# EAGLE board PCB-SE-C15 (EAGLE 6.4)
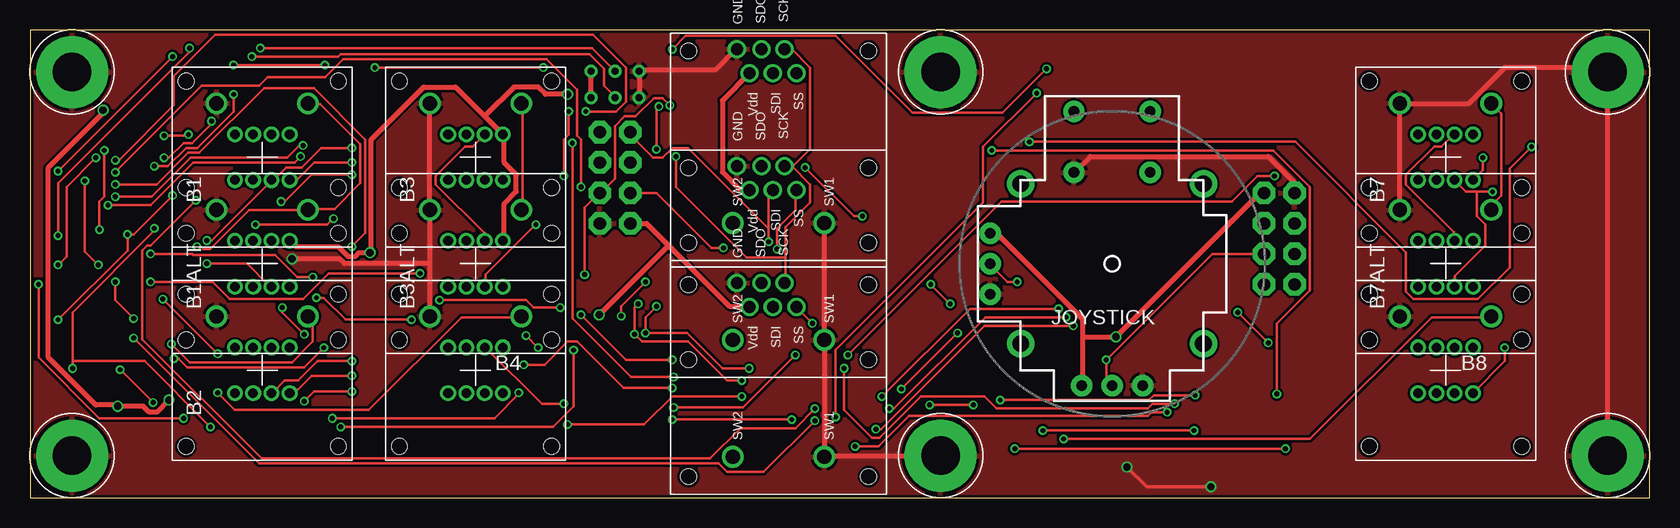
[diagram p0: board, top side]
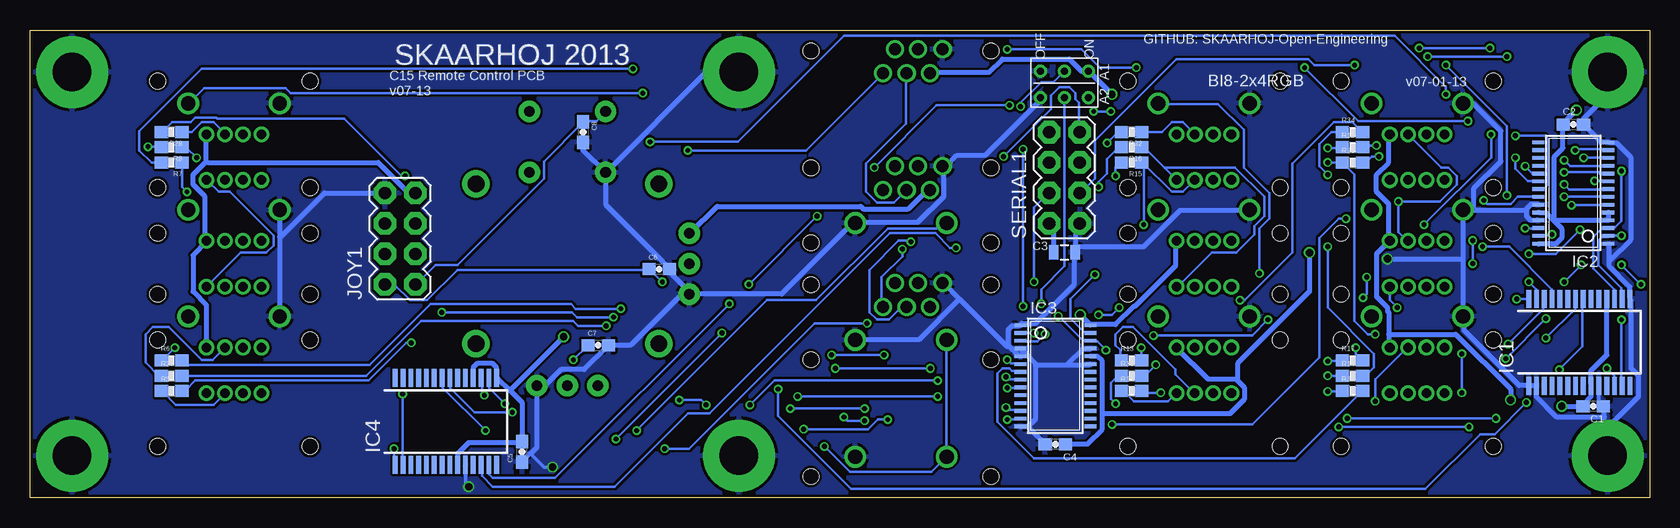
[diagram p1: board, bottom side, seen from below]

Size 135 x 39 mm. Coordinates in mm from the lower left corner, seen from the top.
Outline: 0,0 135,0 135,39 0,39 0,0
Copper layers (1*16): Top 0.035mm / dielectric 1.5mm / Bottom 0.035mm
Design rules "Fusion_eagle_rule_v1.1": minimum track width 6mil, minimum drill 12mil, track to track 6mil, track to pad 6mil, pad to pad 6mil, via to via 6mil, smd to smd 0mil, copper to edge 10mil, drill to drill 10mil, minimum pad ring 10mil, minimum via ring 6mil, stop-mask expansion 2mil, vias tented up to drill 100mil, thermal gap 10mil
Net classes: 0 default: width 0.203 mm, drill 0.406 mm, clearance 0.203 mm; 1 Power: width 0.406 mm, drill 0.61 mm, clearance 0.203 mm

## Footprints (pad centres in the part's own frame; a part is rotated, then mirrored left to right if it is on the bottom)
NKK-KP01 = drill 0.8: B(-) 1.905,-0.762; COM(+) 1.905,-2.286; G(-) -1.905,-2.286; P$3 1.905,0.762; P$4 1.905,2.286; P$7 -1.905,0.762; P$8 -1.905,2.286; R(-) -1.905,-0.762 | drill 1.2: P$1 4.496,3.81; P$1A 4.496,-3.81 | hole 1.3: -6.35,6.35; 6.35,6.35; 6.35,-6.35; -6.35,-6.35
0603-CAP = smd 1.1 x 1: 1 -0.85,0; 2 0.85,0
0805 = smd 0.8 x 1.2: 1 -0.9,0; 2 0.9,0
SSOP28 = smd 0.4 x 1.5: 1 -4.225,-3.625; 2 -3.575,-3.625; 3 -2.925,-3.625; 4 -2.275,-3.625; 5 -1.625,-3.625; 6 -0.975,-3.625; 7 -0.325,-3.625; 8 0.325,-3.625; 9 0.975,-3.625; 10 1.625,-3.625; 11 2.275,-3.625; 12 2.925,-3.625; 13 3.575,-3.625; 14 4.225,-3.625; 15 4.225,3.625; 16 3.575,3.625; 17 2.925,3.625; 18 2.275,3.625; 19 1.625,3.625; 20 0.975,3.625; 21 0.325,3.625; 22 -0.325,3.625; 23 -0.975,3.625; 24 -1.625,3.625; 25 -2.275,3.625; 26 -2.925,3.625; 27 -3.575,3.625; 28 -4.225,3.625
TSSOP28 = smd 0.305 x 0.991: 1 -4.225,-2.918; 2 -3.575,-2.918; 3 -2.925,-2.918; 4 -2.275,-2.918; 5 -1.625,-2.918; 6 -0.975,-2.918; 7 -0.325,-2.918; 8 0.325,-2.918; 9 0.975,-2.918; 10 1.625,-2.918; 11 2.275,-2.918; 12 2.925,-2.918; 13 3.575,-2.918; 14 4.225,-2.918; 15 4.225,2.918; 16 3.575,2.918; 17 2.925,2.918; 18 2.275,2.918; 19 1.625,2.918; 20 0.975,2.918; 21 0.325,2.918; 22 -0.325,2.918; 23 -0.975,2.918; 24 -1.625,2.918; 25 -2.275,2.918; 26 -2.925,2.918; 27 -3.575,2.918; 28 -4.225,2.918
2X4 = drill 1.016 pad 1.88 octagon: 1 -3.81,-1.27; 2 -3.81,1.27; 3 -1.27,-1.27; 4 -1.27,1.27; 5 1.27,-1.27; 6 1.27,1.27; 7 3.81,-1.27; 8 3.81,1.27
PLAYSTATION2_ANALOG_JOYSTICK = drill 0.9 pad 1.778: B1A -3.175,12.7; B1B 3.175,12.7; B2A -3.175,7.62; B2B 3.175,7.62 | drill 0.889 pad 1.778: H1 -2.54,-10.16; H2 0,-10.16; H3 2.54,-10.16; V1 -10.16,2.54; V2 -10.16,0; V3 -10.16,-2.54 | drill 1.397 pad 2.286: MOUNT1 -7.62,6.668; MOUNT2 -7.62,-6.668; MOUNT3 7.62,-6.668; MOUNT4 7.62,6.668
0603-RES = smd 1.1 x 1: 1 -0.85,0; 2 0.85,0
SMART_SWITCH = drill 1.2: 1 6.35,3.81; 2 6.35,-3.81 | drill 1: 3 -8.153,-3.48; 4 -6.147,-2.413; 5 -8.153,-1.422; 6 -6.147,-0.483; 7 -8.153,0.508; 8 -6.147,1.499 | hole 1.3: -8.001,7.506; 8.001,7.506; 8.001,-7.506; -8.001,-7.506
3.2MMPAD6MM = drill 3.2 pad 6: P$1 0,0
2BITADDR = drill 0.6: A1 0,0; A2 2.2,0; H2 0,2; H3 2.2,2; L2 0,-2; L3 2.2,-2

## Placement (x,y rotation side)
B1  KP01-RGB  [NKK-KP01]  19.36,28.39 90 top
B1ALT  KP01-RGB  [NKK-KP01]  19.36,19.5 90 top
B2  KP01-RGB  [NKK-KP01]  19.36,10.61 90 top
B3  KP01-RGB  [NKK-KP01]  37.14,28.39 90 top
B3ALT  KP01-RGB  [NKK-KP01]  37.14,19.5 90 top
B4  KP01-RGB  [NKK-KP01]  37.14,10.61 90 top
B7  KP01-RGB  [NKK-KP01]  118,28.39 90 top
B7ALT  KP01-RGB  [NKK-KP01]  118,19.5 90 top
B8  KP01-RGB  [NKK-KP01]  118,10.61 90 top
C1  100nF  [0603-CAP]  4.7,7.62 180 bottom
C2  100nF  [0603-CAP]  6.35,31.11 0 bottom
C3  10uF  [0805]  48.77,20.45 0 bottom
C4  100nF  [0603-CAP]  49.53,4.45 180 bottom
C5  100nF  [0603-CAP]  93.98,3.81 90 bottom
C6  10nF  [0603-CAP]  82.55,19.05 0 bottom
C7  10nF  [0603-CAP]  87.63,12.7 0 bottom
C8  10nF  [0603-CAP]  88.9,30.48 270 bottom
IC1  MCP23017SS  [SSOP28]  5.84,12.95 0 bottom
IC2  PCA9685  [TSSOP28]  6.35,25.4 90 bottom
IC3  PCA9685  [TSSOP28]  49.53,10.16 270 bottom
IC4  MCP23017SS  [SSOP28]  100.33,6.35 0 bottom
JOY1  M04X2  [2X4]  104.14,21.59 90 bottom
JOYSTICK  PLAYSTATION2_ANALOG_JOYSTICK  [PLAYSTATION2_ANALOG_JOYSTICK]  90.2,19.5 0 top
R5  270  [0603-RES]  123.19,8.89 0 bottom
R6  270  [0603-RES]  123.19,11.43 0 bottom
R7  270  [0603-RES]  123.19,27.94 180 bottom
R8  270  [0603-RES]  123.19,29.21 180 bottom
R13  270  [0603-RES]  43.18,11.43 0 bottom
R14  270  [0603-RES]  43.18,8.89 0 bottom
R15  270  [0603-RES]  43.18,27.94 180 bottom
R16  270  [0603-RES]  43.18,29.21 180 bottom
R17  270  [0603-RES]  24.77,11.43 0 bottom
R18  270  [0603-RES]  24.77,10.16 0 bottom
R19  270  [0603-RES]  24.77,29.21 0 bottom
R20  270  [0603-RES]  24.77,27.94 0 bottom
R27  270  [0603-RES]  123.19,10.16 0 bottom
R28  270  [0603-RES]  123.19,30.48 180 bottom
R31  270  [0603-RES]  43.18,10.16 0 bottom
R32  270  [0603-RES]  43.18,30.48 180 bottom
R33  270  [0603-RES]  24.77,8.89 0 bottom
R34  270  [0603-RES]  24.77,30.48 0 bottom
SERIAL1  M04X2  [2X4]  48.77,26.67 90 bottom
SSW1  SMART_SWITCHSMART_SWITCH_8PIN  [SMART_SWITCH]  62.4,9.75 270 top
SSW1ALT  SMART_SWITCHSMART_SWITCH_8PIN  [SMART_SWITCH]  62.4,19.5 270 top
SSW2  SMART_SWITCHSMART_SWITCH_8PIN  [SMART_SWITCH]  62.4,29.25 270 top
U$5  GNDPAD6MM  [3.2MMPAD6MM]  3.5,3.5 0 top
U$6  GNDPAD6MM  [3.2MMPAD6MM]  131.5,35.5 0 top
U$8  GNDPAD6MM  [3.2MMPAD6MM]  131.5,3.5 0 top
U$15  GNDPAD6MM  [3.2MMPAD6MM]  3.5,35.5 0 top
U$18  GNDPAD6MM  [3.2MMPAD6MM]  75.9,3.5 0 top
U$19  2BITADDR  [2BITADDR]  48.77,35.56 270 bottom
U$21  GNDPAD6MM  [3.2MMPAD6MM]  75.9,35.5 0 top

## Library data of the parts
B1 B1ALT B2 B3 B3ALT B4 B7 B7ALT B8 JOYSTICK SSW1 SSW1ALT SSW2 U$5 U$6 U$8 U$15 U$18 U$19 U$21 = SKAARHOJ
C1-C8 JOY1 R5-R8 R13-R20 R27 R28 R31-R34 SERIAL1 = SparkFun
IC1 IC4 = microchip; MF: MICROCHIP; MPN: MCP23017-E/SS; OC_FARNELL: 1467674; OC_NEWARK: 31K2960
IC2 IC3 = wsmith

## Nets
5V [Power]: B1.COM(+) B1ALT.COM(+) B2.COM(+) B3.COM(+) B3ALT.COM(+) B4.COM(+) B7.COM(+) B7ALT.COM(+) B8.COM(+) C1.2 C2.1 C3.1 C4.1 C5.2 IC1.9 IC1.18 IC2.4 IC2.5 IC2.24 IC2.28 IC3.24 IC3.28 IC4.9 IC4.15 IC4.18 JOY1.7 JOYSTICK.H1 JOYSTICK.V1 SERIAL1.2 SSW1.4 SSW1ALT.4 SSW2.4 U$19.H2 U$19.H3
A1: IC1.16 IC2.2 IC3.2 IC4.16 U$19.A1
A2: IC1.17 IC2.3 IC3.3 IC4.17 U$19.A2
GND [Power]: B1.P$1 B1ALT.P$1 B2.P$1 B3.P$1 B3ALT.P$1 B4.P$1 B7.P$1 B7ALT.P$1 B8.P$1 C1.1 C2.2 C3.2 C4.2 C5.1 C6.2 C7.2 C8.2 IC1.1 IC1.2 IC1.10 IC1.15 IC2.1 IC2.14 IC2.23 IC2.25 IC3.1 IC3.4 IC3.5 IC3.14 IC3.23 IC3.25 IC4.10 JOY1.8 JOYSTICK.B2A JOYSTICK.H3 JOYSTICK.V3 SERIAL1.1 SSW1.1 SSW1.3 SSW1ALT.1 SSW1ALT.3 SSW2.1 SSW2.3 U$5.P$1 U$6.P$1 U$8.P$1 U$15.P$1 U$18.P$1 U$19.L2 U$19.L3 U$21.P$1
GPA0: B8.P$1A IC1.21
GPA1: B7.P$1A B7ALT.P$1A IC1.22
GPA2: IC1.23
GPA3: IC1.24
GPA4: B1.P$1A B1ALT.P$1A IC1.25
GPA5: B2.P$1A IC1.26
GPA6: B3.P$1A B3ALT.P$1A IC1.27
GPA7: B4.P$1A IC1.28
GPA8: IC1.8
GPA9: IC1.7
GPA10: IC1.6
I2C_SCL: IC1.12 IC2.26 IC3.26 IC4.12 SERIAL1.4
I2C_SDA: IC1.13 IC2.27 IC3.27 IC4.13 SERIAL1.3
L0: B1.G(-) B1ALT.G(-) R20.1
L0B: B1.B(-) B1ALT.B(-) R34.1
L1: B1.R(-) B1ALT.R(-) R19.1
L1B: B2.B(-) R33.1
L2: B2.G(-) R18.1
L2B: B3.B(-) B3ALT.B(-) R32.1
L3: B2.R(-) R17.1
L3B: B4.B(-) R31.1
L4: B3.G(-) B3ALT.G(-) R16.1
L5: B3.R(-) B3ALT.R(-) R15.1
L6: B4.G(-) R14.1
L6B: B7.B(-) B7ALT.B(-) R28.1
L7: B4.R(-) R13.1
L7B: B8.B(-) R27.1
L12: B7.G(-) B7ALT.G(-) R8.1
L13: B7.R(-) B7ALT.R(-) R7.1
L14: B8.G(-) R6.1
L15: B8.R(-) R5.1
N$2: IC3.13 R27.2
N$3: IC3.12 R28.2
N$4: IC2.13 R13.2
N$5: IC2.12 R14.2
N$6: IC3.11
N$7: IC2.11 R15.2
N$9: IC2.10 R16.2
N$10: IC2.9 R17.2
N$11: IC2.8 R18.2
N$12: IC2.7 R19.2
N$13: IC3.10
N$14: IC3.9 R31.2
N$15: IC3.8 R32.2
N$16: IC3.7 R33.2
N$17: IC3.6 R34.2
N$19: IC2.6 R20.2
N$20: IC2.15
N$21: IC2.16
N$22: IC2.17
N$23: IC2.18
N$24: IC2.19 R8.2
N$25: IC2.20 R7.2
N$26: IC2.21 R6.2
N$27: IC2.22 R5.2
POT1: C6.1 JOY1.2 JOYSTICK.V2
POT2: C7.1 JOY1.3 JOYSTICK.H2
SDI_MOSI: SERIAL1.8 SSW1.6 SSW1ALT.6 SSW2.6
SDI_SCLK: SERIAL1.7 SSW1.7 SSW1ALT.7 SSW2.7
SSGPA0: IC4.21 SSW1.2 SSW1ALT.2
SSGPA1: IC4.22 SSW2.2
SSGPB0: IC4.1 SSW1.8 SSW1ALT.8
SSGPB1: IC4.2 SSW2.8
SW: C8.1 JOY1.1 JOYSTICK.B1A

## Tracks (layer width: path | path; a pad name or v marks a point on that pad's centre or on a via)
5V  (via drill 0.61)
  Top 0.406: 53.24,21.03 51.41,22.86 SERIAL1.2 | 53.24,21.03 58.32,15.95 59.94,15.95 SSW1.4 | B3ALT.COM(+) 39.52,21.44 39.52,24.49 40.54,25.5 40.54,26.92 39.52,27.94 39.52,30.28 B3.COM(+) 39.32,30.38 37.9,31.8 | v47.45,15.24 53.24,21.03 | v11.58,8.13 10.57,7.11 9.96,7.11 9.45,7.62 v7.32,7.62 7.21,7.72 5.49,7.72 1.52,11.68 1.52,27.53 6.1,32.11 v6.1,32.31 | B1ALT.COM(+) 21.74,21.34 22.15,20.93 25.7,20.93 26.52,20.12 27.13,20.12 27.43,20.42 v28.35,20.42 28.45,20.52 28.45,29.87 32.82,34.24 35.46,34.24 37.9,31.8 | U$19.H3 46.74,33.43 46.74,35.56 U$19.H2 | SSW1ALT.4 59.94,25.7 59.13,25.7 57.71,27.13 57.71,33.12 59.94,35.36 SSW2.4 | 87.78,13.41 87.78,9.45 87.68,9.35 JOYSTICK.H1 | 87.78,13.41 87.78,14.83 80.67,21.95 80.06,21.95 JOYSTICK.V1 | 87.78,13.41 v90.53,13.41 102.51,25.4 JOY1.7 | 37.9,31.8 40.34,34.24 42.37,34.24 42.98,33.63 v44.81,33.63
  Bottom 0.406: C3.1 49.68,20.52 49.68,22.55 49.99,22.86 SERIAL1.2 | B3ALT.COM(+) 39.52,21.34 39.52,19.3 42.88,15.95 42.98,15.95 44.5,14.43 46.53,14.43 IC3.28 46.74,14.53 v47.45,15.24 | 45.62,7.01 45.62,5.69 46.84,4.47 48.67,4.47 C4.1 | 45.62,7.01 45.62,11.38 46.02,11.79 46.53,11.79 IC3.24 | 34.44,9.86 36.78,9.86 39.42,12.5 B4.COM(+) | 34.44,9.86 33.73,9.14 33.73,8.23 34.95,7.01 45.62,7.01 | IC2.5 3.45,23.77 3.45,23.16 IC2.4 3.66,23.16 7.82,23.16 7.92,23.06 | 8.03,23.16 8.64,23.77 9.25,23.77 IC2.24 | 8.03,23.16 7.92,23.06 | 7.92,23.06 7.32,22.45 7.32,21.64 7.82,21.13 9.25,21.13 IC2.28 | 8.03,23.16 7.92,23.27 7.92,28.45 7.21,29.16 7.21,31.09 C2.1 7.11,31.29 v6.1,32.31 | IC1.18 3.56,16.56 3.56,11.89 4.88,10.57 4.88,9.45 IC1.9 4.88,9.25 4.88,8.43 5.49,7.82 5.49,7.62 C1.2 v7.32,7.62 | 21.74,13.61 21.74,15.44 21.84,15.54 21.84,15.85 22.76,16.76 22.76,20.32 21.74,21.34 B1ALT.COM(+) 21.74,21.54 21.74,24.49 22.76,25.5 22.76,26.92 21.74,27.94 21.74,30.28 B1.COM(+) | 21.74,13.61 21.74,12.6 B2.COM(+) | v11.58,8.13 11.58,9.04 16.15,13.61 21.74,13.61 | v28.35,20.42 28.35,17.17 34.34,11.18 34.34,9.96 34.44,9.86 | B8.COM(+) 120.29,12.6 120.29,16.05 121.41,17.17 121.41,20.22 120.29,21.34 B7ALT.COM(+) 120.4,21.54 120.4,25.09 121.41,26.11 121.41,26.92 120.29,28.04 | 120.29,28.04 120.29,30.28 B7.COM(+) | JOY1.7 103.43,25.4 105.97,27.94 120.19,27.94 120.29,28.04 | SSW2.4 59.94,35.46 55.07,35.46 53.95,36.58 48.36,36.58 47.35,35.56 U$19.H2 46.63,35.46 v44.81,33.63 | 95,8.94 96.01,9.96 IC4.15 96.11,10.16 96.11,10.87 96.42,11.18 97.74,11.18 98.04,10.87 98.04,10.06 IC4.18 | 95,8.94 93.98,7.92 C5.2 94.08,4.57 98.45,4.57 99.36,3.66 99.36,2.74 IC4.9
  Bottom 0.406: v90.53,13.41 95,8.94 | SSW1ALT.4 60.05,25.6 60.25,25.6 61.77,24.08 65.53,24.08 65.73,24.28 77.72,24.28 79.96,22.05 JOYSTICK.V1
A1  (via drill 0.41)
  Top 0.203: v52.22,15.95 51.31,15.04 v51.31,13.72 54.76,13.72 57.71,10.77 v59.94,10.77 | v52.22,29.06 52.22,32.41 v52.43,32.61 | v95.4,7.82 93.57,7.82 93.17,7.42 80.57,7.42 79.55,8.43 74.27,8.43 70.81,4.98 70.21,4.98 67.87,7.32 v67.87,10.77 | v2.34,21.84 2.34,26.21 13.31,37.19 v13.31,37.49 | v19.2,37.49 46.84,37.49 U$19.A1
  Bottom 0.203: IC1.16 2.34,16.66 2.34,17.48 4.27,19.41 4.27,21.44 3.96,21.74 3.45,21.74 IC2.2 3.35,21.84 v2.34,21.84 | v51.31,13.72 52.43,13.72 IC3.2 | v52.22,29.06 v52.22,15.95 | v52.43,32.61 52.43,32.92 50.7,34.65 49.68,34.65 U$19.A1 | v95.4,7.82 96.72,9.14 96.72,9.96 IC4.16 | v59.94,10.77 v67.87,10.77 | v19.2,37.49 v13.31,37.49
A2  (via drill 0.41)
  Top 0.203: v50.7,16.15 50.39,15.85 v50.39,13.61 51,13.01 54.86,13.01 58.12,9.75 v59.33,9.75 | v97.13,8.53 93.67,8.53 93.27,8.13 v80.87,8.13 | v74.98,7.72 v78.64,7.72 | v11.89,36.78 v2.34,27.23 | v18.49,36.78 25.7,36.78 25.91,36.98 46.63,36.98 47.85,35.76 47.85,34.34 48.77,33.43 U$19.A2
  Bottom 0.203: IC1.17 2.95,16.66 2.95,17.37 4.67,19.1 4.67,21.74 3.96,22.45 3.45,22.45 IC2.3 3.35,22.55 2.85,22.55 2.34,23.06 v2.34,27.23 | v50.39,13.61 51,13.01 52.43,13.01 IC3.3 | v50.7,16.15 50.7,17.37 48.77,19.3 U$19.A2 | v97.13,8.53 97.33,8.74 97.33,9.96 IC4.17 | v80.87,8.13 79.05,8.13 v78.64,7.72 | v74.98,7.72 72.95,9.75 v59.33,9.75 | v18.49,36.78 v11.89,36.78
GND  (via drill 0.6, 0.61)
  Top 0.305: v98.42,0.89 93.09,0.89 v91.44,2.54
  Top 0.406: B7ALT.P$1 114.2,24.08 114.2,32.82 B7.P$1 114.4,32.82 119.89,32.82 122.94,35.87 131.17,35.87 131.37,35.66 U$6.P$1 131.47,35.46 131.47,3.56 U$8.P$1 | 33.33,19.51 33.33,23.98 B3ALT.P$1 33.33,24.18 33.33,32.82 B3.P$1 | 33.33,19.51 33.33,15.14 B4.P$1 | U$19.L3 50.8,33.43 50.8,35.56 U$19.L2 50.9,35.66 57.1,35.66 58.83,37.39 SSW2.3 | U$18.P$1 75.89,3.45 66.45,3.45 SSW1.1 66.24,3.45 66.24,13.11 SSW1ALT.1 66.24,13.31 66.24,22.86 SSW2.1 | v21.84,19.91 25.81,19.91 26.21,19.51 33.33,19.51 | JOY1.8 105.36,25.4 105.36,26.31 103.23,28.45 88.39,28.45 87.07,27.13 JOYSTICK.B2A
  Bottom 0.305: IC4.10 98.7,1.17 v98.42,0.89 | v91.44,2.54 92.15,2.54 93.27,3.66 | IC1.10 4.22,7.99 C1.1
  Bottom 0.406: 114.2,21.74 114.2,23.98 B7ALT.P$1 | 114.2,21.74 114.2,15.14 B8.P$1 | JOY1.8 110.44,25.4 114.1,21.74 114.2,21.74 | U$15.P$1 3.56,35.46 3.56,33.53 5.49,31.6 5.49,31.29 C2.2 5.49,31.09 4.06,29.67 3.45,29.67 IC2.14 3.25,29.57 2.74,29.57 1.52,28.35 1.52,21.54 3.25,19.81 3.35,19.81 | 10.26,23.98 10.26,24.08 9.86,24.49 9.35,24.49 IC2.23 | 10.26,23.98 10.26,23.47 9.96,23.16 9.35,23.16 IC2.25 | 14.63,23.98 15.54,23.98 B1ALT.P$1 15.54,23.77 15.54,19.91 | 14.63,23.98 10.26,23.98 | 15.54,19.91 15.54,15.14 B2.P$1 15.44,14.94 15.44,13.92 10.87,9.35 10.26,9.35 IC1.1 10.06,9.35 9.45,9.35 IC1.2 9.45,9.14 9.45,8.43 7.72,6.71 3.76,6.71 | 14.63,23.98 14.63,25.81 12.39,28.04 12.39,30.58 14.63,32.82 15.54,32.82 B1.P$1 | 3.35,19.81 3.35,19.3 1.63,17.58 1.63,16.66 IC1.15 1.52,16.46 1.52,10.77 0.91,10.16 0.91,8.43 3.66,5.69 U$5.P$1 3.76,3.76 3.76,6.71 | 3.35,19.81 3.35,21.13 IC2.1 | 3.76,6.71 3.76,7.62 C1.1 | C5.1 93.98,3.05 93.37,3.66 93.27,3.66 92.76,4.17 92.76,9.25 JOYSTICK.H3 92.56,9.35 92.05,9.35 90.73,10.67 88.8,10.67 86.87,12.6 C7.2 84.94,12.7 80.77,16.87 80.06,16.87 JOYSTICK.V3 | C8.2 88.9,28.96 87.07,27.13 JOYSTICK.B2A | JOYSTICK.V3 80.06,17.17 81.69,18.8 81.69,19 C6.2 81.79,19.2 86.97,24.38 86.97,26.92 JOYSTICK.B2A | U$21.P$1 76,35.46 78.64,35.46 86.87,27.23 JOYSTICK.B2A | C3.2 47.85,20.52 47.85,22.55 47.55,22.86 SERIAL1.1 | 51.82,5.89 52.43,5.89 IC3.14 | 51.82,5.89 50.39,4.47 C4.2 | 51.1,11.07 48.46,11.07 | 48.46,11.07 46.63,11.07 IC3.23 | 52.12,12.09 52.43,12.39 IC3.4 | 52.12,12.09 51.1,11.07 | 52.12,12.09 52.43,11.79 IC3.5 52.63,11.89 53.44,12.7 | IC3.25 46.63,12.39 47.24,12.39 48.46,11.18 48.46,11.07
  Bottom 0.406: 53.44,12.7 53.44,14.02 53.14,14.33 52.53,14.33 IC3.1 52.32,14.53 51.21,14.53 47.95,17.78 47.95,20.32 C3.2 | 51.82,5.89 51.21,6.5 51.21,10.97 51.1,11.07 | 57.51,16.56 53.54,12.6 53.44,12.7 | 57.51,16.56 58.83,17.88 SSW1.3 | B3ALT.P$1 33.43,23.98 39.12,23.98 42.16,20.93 47.75,20.93 C3.2 | U$19.L3 50.8,33.33 50.8,33.12 55.37,28.55 57.71,28.55 58.62,27.64 SSW1ALT.3 58.83,27.64 58.83,25.09 60.96,22.96 66.14,22.96 SSW2.1 66.34,22.96 72.34,16.97 79.86,16.97 JOYSTICK.V3 | 57.51,16.56 60.86,13.21 66.14,13.21 SSW1ALT.1 | v21.84,19.91 15.54,19.91
  pour Top: 0,0 135,0 135,38.99 0,38.99
  pour Bottom: 0,0 135.13,0 135.13,39.12 0,39.12
GPA0  (via drill 0.41)
  Top 0.203: v10.26,7.92 v7.52,10.67 | v77.32,13.72 v72.64,9.04 | v86.16,4.88 106.68,4.88 116.84,15.04 121.72,15.04 B8.P$1A
  Bottom 0.203: v7.52,10.67 5.59,12.6 5.59,16.56 IC1.21 | v10.26,7.92 12.9,5.28 14.12,5.28 18.69,0.71 66.55,0.71 72.64,6.81 v72.64,9.04 | v86.16,4.88 v77.32,13.72
GPA1  (via drill 0.41)
  Top 0.203: v8.64,13.31 19.1,2.85 57.4,2.85 58.12,2.13 61.16,2.13 v65.43,6.4 | v67.16,6.71 67.16,12.29 79.45,24.59 79.45,29.26 v83.92,33.73 | B7ALT.P$1A 121.82,24.08 121.82,24.38 122.63,25.2 122.63,32 121.82,32.82 B7.P$1A
  Bottom 0.203: v8.64,13.31 6.2,15.75 6.2,16.56 IC1.22 | v65.43,6.4 66.85,6.4 v67.16,6.71 | v83.92,33.73 113.28,33.73 113.69,34.14 120.5,34.14 121.72,32.92 B7.P$1A
GPA4  (via drill 0.41)
  Top 0.203: v13.92,20.93 14.22,20.93 14.43,20.73 15.04,20.73 18.29,23.98 23.16,23.98 B1ALT.P$1A 23.27,24.08 25.4,24.08 27.53,26.21 27.53,29.46 24.18,32.82 23.27,32.82 B1.P$1A
  Bottom 0.203: v13.92,20.93 11.68,20.93 8.13,17.37 8.13,16.66 IC1.25
GPA5  (via drill 0.41)
  Top 0.203: v11.79,12.8 13.31,11.28 21.84,11.28 23.57,13.01 23.57,14.73 23.27,15.04 B2.P$1A
  Bottom 0.203: v11.79,12.8 8.84,15.75 8.84,16.56 IC1.26
GPA6  (via drill 0.41)
  Top 0.203: v10.06,17.98 15.24,17.98 16.66,16.56 22.76,16.56 24.89,18.69 v32.51,18.69 | B3ALT.P$1A 41.05,24.08 41.05,32.82 B3.P$1A
  Bottom 0.203: v10.06,17.98 9.45,17.37 9.45,16.66 IC1.27 | v32.51,18.69 32.51,22.45 31.7,23.27 31.7,25.4 33.83,27.53 33.83,30.68 35.97,32.82 40.95,32.82 B3.P$1A
GPA7  (via drill 0.41)
  Top 0.203: v15.65,11.99 v11.07,16.56 | v15.65,8.74 17.07,7.32 28.25,7.32 35.97,15.04 40.95,15.04 B4.P$1A
  Bottom 0.203: v11.07,16.56 10.16,16.56 IC1.28 | v15.65,8.74 v15.65,11.99
I2C_SCL  (via drill 0.41)
  Top 0.203: v10.36,22.45 10.36,22.25 3.56,15.44 3.56,11.38 | v3.56,10.77 3.56,11.38 | v49.28,15.14 49.28,15.95 v51.31,17.98 | v57.81,20.83 56.79,20.83 52.22,25.4 SERIAL1.4 | 3.56,11.38 9.55,11.38 v15.04,5.89 | v25.91,5.89 43.59,5.89 45.31,7.62 v45.31,12.29
  Bottom 0.203: v10.36,22.45 9.35,22.45 IC2.26 | v3.56,10.77 2.95,10.16 2.95,9.35 IC1.12 | v49.28,15.14 47.24,13.11 46.63,13.11 IC3.26 46.53,13.01 46.02,13.01 v45.31,12.29 | v51.31,17.98 51.31,24.18 50.09,25.4 SERIAL1.4 | v57.81,20.83 58.32,20.83 59.54,22.05 63.3,22.05 78.33,7.01 80.16,7.01 86.26,0.91 96.42,0.91 97.33,1.83 97.33,2.64 IC4.12 | v25.91,5.89 v15.04,5.89
I2C_SDA  (via drill 0.41)
  Top 0.203: v2.34,14.83 8.13,20.62 v8.13,21.95 8.64,21.95 v11.89,25.2 | v46.23,18.59 46.23,24.18 47.45,25.4 SERIAL1.3 47.55,25.4 48.77,26.62 48.77,30.99 49.58,31.8 50.49,31.8 52.02,33.33 52.73,33.33 v53.34,32.72 | v75.08,17.78 v76.71,16.15 | v69.39,23.47 68.68,23.47 v64.62,27.53 | v24.59,36.07 v16.97,36.07
  Bottom 0.203: v8.13,21.95 8.23,21.84 9.25,21.84 IC2.27 | v2.34,14.83 2.34,9.35 IC1.13 | v46.23,18.59 48.26,16.56 48.26,14.94 47.14,13.82 46.63,13.82 IC3.27 | v76.71,16.15 91.24,1.63 96.42,1.63 96.72,1.93 96.72,2.64 IC4.13 | v69.39,23.47 v75.08,17.78 | v64.62,27.53 59.44,32.72 v53.34,32.72 | v11.89,25.2 11.89,30.99 v16.97,36.07 | v24.59,36.07 27.94,36.07 28.45,36.58 39.42,36.58 46.23,29.77 46.23,26.62 47.45,25.4 SERIAL1.3
L0  (via drill 0.41)
  Top 0.203: v26.82,27.94 23.67,27.94 22.25,26.52 21.74,26.52 B1.G(-) | v21.03,15.85 21.03,15.44 v22.86,13.61
  Bottom 0.203: v26.82,27.94 R20.1 25.6,27.94 24.59,26.92 24.59,14.73 23.47,13.61 v22.86,13.61 | v21.03,15.85 21.64,16.46 21.64,17.58 B1ALT.G(-)
L0B  (via drill 0.41)
  Top 0.203: v26.82,26.92 23.47,26.92 21.23,24.69 v20.93,24.69
  Bottom 0.203: R34.1 26.52,30.48 27.53,29.46 27.53,27.64 v26.82,26.92 | B1ALT.B(-) 20.22,21.44 20.93,22.15 v20.93,24.69 17.48,24.69 16.05,26.11 16.05,26.82 16.76,27.53 17.37,27.53 20.12,30.28 B1.B(-)
L1  (via drill 0.41)
  Top 0.203: v26.82,29.16 24.28,29.16 22.66,27.53 21.34,27.53 20.22,26.42 B1.R(-) 20.12,26.42 15.14,21.44 v14.73,21.44 | v14.73,19.51 18.09,19.51 19.91,17.68 20.12,17.68 B1ALT.R(-)
  Bottom 0.203: v26.82,29.16 25.7,29.16 R19.1 | v14.73,21.44 v14.73,19.51
L1B  (via drill 0.41)
  Top 0.203: v26.82,8.84 23.67,8.84 v22.86,8.03
  Bottom 0.203: v26.82,8.84 25.7,8.84 R33.1 | v22.86,8.03 22.86,9.86 20.22,12.5 B2.B(-)
L2  (via drill 0.41)
  Top 0.203: v26.82,10.16 23.47,10.16 22.05,8.74 21.74,8.74 B2.G(-)
  Bottom 0.203: v26.82,10.16 R18.1
L2B
  Top 0.203: B3ALT.B(-) 37.9,21.44 37.9,22.05 33.83,26.11 33.83,26.82 36.27,29.26 36.88,29.26 37.9,30.28 B3.B(-)
  Bottom 0.203: R32.1 40.64,30.48 39.83,31.29 38.91,31.29 38,30.38 B3.B(-)
L3  (via drill 0.41)
  Top 0.203: v26.82,11.38 23.98,11.38 22.35,9.75 21.23,9.75 20.22,8.74 B2.R(-)
  Bottom 0.203: v26.82,11.38 25.7,11.38 R17.1
L3B  (via drill 0.41)
  Top 0.203: v44.5,7.82 42.67,7.82 38,12.5 B4.B(-)
  Bottom 0.203: R31.1 44.3,10.16 44.91,9.55 44.91,8.23 v44.5,7.82
L4
  Bottom 0.203: 40.39,27.48 39.42,26.52 B3.G(-) | 40.39,27.48 42.06,29.16 42.27,29.16 R16.1 | B3ALT.G(-) 39.42,17.68 39.22,17.68 36.47,20.42 34.44,20.42 32.92,21.95 32.92,22.66 32.11,23.47 32.11,25.09 34.54,27.53 40.34,27.53 40.39,27.48
L5  (via drill 0.41)
  Top 0.203: v42.16,22.76 38,18.59 38,17.68 B3ALT.R(-)
  Bottom 0.203: B3.R(-) 38,26.42 38.91,25.5 39.83,25.5 42.27,27.94 R15.1 42.16,27.74 v42.16,22.76
L6
  Bottom 0.203: R14.1 43.99,8.84 43.79,8.84 42.98,8.03 40.13,8.03 39.52,8.64 B4.G(-)
L6B
  Top 0.203: B7ALT.B(-) 118.67,21.44 118.67,22.15 114.71,26.11 114.71,26.92 117.04,29.26 117.65,29.26 118.67,30.28 B7.B(-)
  Bottom 0.203: R28.1 121.51,30.48 120.7,31.29 119.69,31.29 118.77,30.38 B7.B(-)
L7
  Bottom 0.203: R13.1 44.09,11.48 44.09,12.29 44.5,12.7 44.5,13.61 43.89,14.22 43.08,14.22 39.52,10.67 39.52,10.26 38,8.74 B4.R(-)
L7B
  Bottom 0.203: R27.1 124.26,10.16 125.37,11.28 125.37,13.61 124.77,14.22 123.44,14.22 120.7,11.48 119.79,11.48 118.77,12.5 B8.B(-)
L12  (via drill 0.41)
  Top 0.203: v121.11,28.35 121.11,27.33 120.29,26.52 B7.G(-)
  Bottom 0.203: v121.11,28.35 121.92,29.16 122.33,29.16 R8.1 | B7ALT.G(-) 120.19,17.68 117.45,20.42 115.32,20.42 114.71,21.03 114.71,21.84 118.36,25.5 119.28,25.5 120.19,26.42 B7.G(-)
L13  (via drill 0.41)
  Top 0.203: 120.6,25.5 119.69,25.5 118.77,26.42 B7.R(-) | 120.6,25.5 v121.92,25.5 | 120.6,25.5 120.6,23.47 121.31,22.76 121.31,21.03 118.77,18.49 118.77,17.68 B7ALT.R(-)
  Bottom 0.203: v121.92,25.5 122.33,25.91 122.33,27.94 R7.1
L14  (via drill 0.41)
  Top 0.203: v122.94,12.5 122.94,11.38 120.29,8.74 B8.G(-)
  Bottom 0.203: v122.94,12.5 123.95,11.48 R6.1
L15
  Bottom 0.203: R5.1 123.95,8.84 122.83,7.72 119.69,7.72 118.77,8.64 B8.R(-)
N$2  (via drill 0.41)
  Top 0.203: v63.5,6.5 v53.54,6.5 | v70.51,5.69 70.92,5.69 79.55,14.33 v86.97,14.33
  Bottom 0.203: v53.54,6.5 52.53,6.5 IC3.13 | v63.5,6.5 64.31,6.5 65.13,5.69 v70.51,5.69 | v86.97,14.33 89.31,14.33 89.71,14.73 102.41,14.73 106.98,10.16 R27.2
N$3  (via drill 0.41)
  Top 0.203: v53.65,7.52 59.44,7.52 v63.8,11.89 | v68.17,11.89 80.97,24.69 100.18,24.69 102.31,26.82 v103.73,26.82
  Bottom 0.203: v53.65,7.52 53.44,7.32 52.53,7.32 IC3.12 | v68.17,11.89 v63.8,11.89 | v103.73,26.82 104.04,26.82 108.81,31.6 119.38,31.6 119.48,31.7 121.21,31.7 121.61,31.29 123.14,31.29 123.95,30.48 R28.2
N$4  (via drill 0.41)
  Top 0.203: v6.2,28.96 6.2,25.09 5.79,24.69 v5.79,22.35 | v10.06,20.32 13.51,20.32 13.61,20.22 20.42,20.22 22.25,18.39 v23.57,18.39 | v23.88,16.66 24.49,16.66 26.31,14.83 v31.8,14.83 | v42.37,12.5 v41.35,13.51
  Bottom 0.203: v6.2,28.96 6.1,29.06 3.45,29.06 IC2.13 | v5.79,22.35 7.82,20.32 v10.06,20.32 | v23.57,18.39 23.57,16.97 v23.88,16.66 | v31.8,14.83 33.12,13.51 v41.35,13.51 | v42.37,12.5 42.37,11.48 R13.2
N$5  (via drill 0.41)
  Top 0.203: v5.49,28.35 3.05,25.91 3.05,20.12 v2.34,19.41 | v0.71,17.78 0.71,11.68 5.79,6.6 v12.8,6.6 | v25.2,6.6 38.71,6.6 40.74,8.64 v40.74,8.74
  Bottom 0.203: v5.49,28.35 3.45,28.35 IC2.12 | v0.71,17.78 v2.34,19.41 | v25.2,6.6 v12.8,6.6 | v40.74,8.74 42.16,8.74 42.27,8.84 R14.2
N$7  (via drill 0.41)
  Top 0.203: v7.11,28.14 7.42,28.14 11.99,32.72 11.99,35.15 15.44,38.61 46.94,38.61 49.68,35.87 49.68,33.02 48.87,32.21 v46.33,32.21 | v44.91,32.21 44.91,30.28 44.5,29.87 v44.5,26.82
  Bottom 0.203: v7.11,28.14 6.6,27.64 3.45,27.64 IC2.11 | v44.91,32.21 v46.33,32.21 | v44.5,26.82 44.5,27.53 44.09,27.94 R15.2
N$9  (via drill 0.41)
  Top 0.203: v7.11,27.13 14.33,34.34 19.1,34.34 19.81,35.05 24.59,35.05 26.11,36.58 43.08,36.58 45.62,34.04 45.62,30.18 45.92,29.87 v45.92,25.91
  Bottom 0.203: v7.11,27.13 4.27,27.13 4.17,27.03 3.45,27.03 IC2.10 | v45.92,25.91 45.92,26.31 45.21,27.03 45.21,28.25 44.3,29.16 44.09,29.16 R16.2
N$10  (via drill 0.41)
  Top 0.203: v4.57,26.42 4.57,20.52 v5.69,19.41 | v7.11,17.98 7.11,16.46 v8.64,14.94 | v11.99,11.58 12.39,11.58 13.11,10.87 22.86,10.87 v24.49,12.5
  Bottom 0.203: v4.57,26.42 3.45,26.42 IC2.9 | v7.11,17.98 v5.69,19.41 | v11.99,11.58 v8.64,14.94 | v24.49,12.5 24.49,11.99 23.98,11.48 R17.2
N$11  (via drill 0.41)
  Top 0.203: v7.11,26.11 10.57,26.11 13.21,28.75 14.12,28.75 19.51,34.14 23.67,34.14 27.94,29.87 27.94,22.05 v26.82,20.93
  Bottom 0.203: v7.11,26.11 6.71,25.7 3.45,25.7 IC2.8 | v26.82,20.93 26.82,15.85 22.96,11.99 22.96,10.87 23.67,10.16 R18.2
N$12  (via drill 0.41)
  Top 0.203: v7.11,25.09 10.16,25.09 13.41,28.35 21.44,28.35 22.45,29.36 v22.76,29.36
  Bottom 0.203: v7.11,25.09 3.45,25.09 IC2.7 | v22.76,29.36 23.77,29.36 23.88,29.26 R19.2
N$14  (via drill 0.41)
  Top 0.203: v53.54,9.14 49.48,9.14 45.62,13.01 44.81,13.01 42.88,11.07 v41.15,11.07
  Bottom 0.203: v53.54,9.14 52.53,9.14 IC3.9 | v41.15,11.07 42.06,10.16 R31.2
N$15  (via drill 0.41)
  Top 0.203: v53.65,10.06 50.09,10.06 45.21,14.94 v45.21,29.57
  Bottom 0.203: v53.65,10.06 53.44,9.86 52.53,9.86 IC3.8 | v45.21,29.57 44.3,30.48 R32.2
N$16
  Bottom 0.203: IC3.7 52.53,10.57 53.14,10.57 53.34,10.77 53.95,10.77 54.36,10.36 54.36,6.3 51.31,3.25 29.57,3.25 23.98,8.84 R33.2
N$17  (via drill 0.41)
  Top 0.203: v53.54,11.48 49.68,11.48 v45.92,15.24 | v44.2,15.85 41.96,15.85 41.35,16.46 v34.14,16.46
  Bottom 0.203: v53.54,11.48 53.24,11.18 52.53,11.18 IC3.6 | v45.92,15.24 44.81,15.24 v44.2,15.85 | v34.14,16.46 33.73,16.46 29.77,20.42 29.77,27.84 26.31,31.29 24.79,31.29 23.98,30.48 R34.2
N$19  (via drill 0.41)
  Top 0.203: v6.5,24.38 10.06,24.38 13.61,27.94 22.05,27.94 v22.55,28.45
  Bottom 0.203: v6.5,24.38 3.45,24.38 IC2.6 | v22.55,28.45 23.16,28.45 23.67,27.94 R20.2
N$24  (via drill 0.41)
  Top 0.203: v10.36,27.64 11.48,27.64 13.01,29.16 13.92,29.16 16.97,32.21 v16.97,33.63 | v83.31,29.67 105.46,29.67 114.71,20.42 114.71,17.17 115.32,16.56 120.7,16.56 123.34,19.2 123.34,27.43 v125.17,29.26
  Bottom 0.203: v10.36,27.64 9.75,27.03 9.35,27.03 IC2.19 | v16.97,33.63 16.97,34.24 21.23,38.51 67.16,38.51 76,29.67 v83.31,29.67 | v125.17,29.26 124.05,29.26 R8.2
N$25  (via drill 0.41)
  Top 0.203: v11.18,28.35 11.58,28.35 12.8,29.57 13.51,29.57 15.14,31.19 v15.14,31.39 | v42.77,35.87 v28.75,35.87 | v53.54,37.39 54.66,38.51 67.16,38.51 73.56,32.11 81.08,32.11 v84.73,35.76
  Bottom 0.203: v11.18,28.35 11.18,27.43 10.16,26.42 9.35,26.42 IC2.20 | v15.14,31.39 24.28,31.39 v28.75,35.87 | v42.77,35.87 45.82,35.87 47.35,37.39 v53.54,37.39 | v84.73,35.76 120.7,35.76 125.88,30.58 125.88,28.96 124.87,27.94 R7.2
N$26  (via drill 0.41)
  Top 0.203: v11.18,30.18 13.11,30.18 v13.21,30.28 | v18.8,22.76 24.79,22.76 v25.3,23.27 | v44.81,6.1 51.21,6.1 53.54,8.43 v59.33,8.43 | v71.02,8.43 78.33,15.75 v85.75,15.75
  Bottom 0.203: v11.18,30.18 8.74,30.18 8.43,29.87 8.43,26.11 8.74,25.81 9.25,25.81 IC2.21 | v13.21,30.28 13.21,28.35 v18.8,22.76 | v25.3,23.27 25.91,23.27 27.53,21.64 27.53,11.68 33.12,6.1 v44.81,6.1 | v71.02,8.43 v59.33,8.43 | v85.75,15.75 89.51,15.75 89.92,16.15 101.6,16.15 106.68,11.07 122.02,11.07 122.33,11.38 R6.2
N$27  (via drill 0.41)
  Top 0.203: v13.82,24.79 10.06,21.03 9.75,21.03 9.35,20.62 9.35,13.21 19.3,3.25 56.69,3.25 59.23,5.79 63.8,5.79 v65.43,7.42 | v71.63,7.42 72.03,7.42 79.65,15.04 v86.36,15.04 | v103.23,12.9 v100.69,15.44
  Bottom 0.203: v13.82,24.79 13.51,24.49 11.58,24.49 10.97,25.09 9.35,25.09 IC2.22 | v71.63,7.42 v65.43,7.42 | v86.36,15.04 89.41,15.04 89.81,15.44 v100.69,15.44 | v103.23,12.9 103.63,12.9 106.78,9.75 121.21,9.75 122.02,8.94 122.33,8.94 R5.2
POT1  (via drill 0.41)
  Top 0.203: v82.3,17.98 81.48,17.98 80.06,19.41 JOYSTICK.V2
  Bottom 0.203: v82.3,17.98 83.31,19 C6.1 83.41,19 99.36,19 101.91,16.46 103.33,16.46 104.65,17.78 JOY1.2
POT2  (via drill 0.41)
  Top 0.203: JOYSTICK.H2 90.12,9.35 89.71,9.75 v89.71,11.48 98.55,20.32 JOY1.3
  Bottom 0.203: v89.71,11.48 88.49,12.7 C7.1
SDI_MOSI  (via drill 0.41)
  Top 0.203: 61.57,22.45 61.57,25.3 61.87,25.6 SSW1ALT.6 | 61.57,22.45 v61.57,21.34 | 61.57,22.45 54.86,29.16 53.54,29.16 52.73,28.35 51.92,28.35 50.09,30.18 50.09,30.48 SERIAL1.8
  Bottom 0.203: v61.57,21.34 61.67,21.44 62.59,21.44 65.02,19 65.02,15.44 64.41,14.83 63.4,14.83 62.38,15.85 61.98,15.85 SSW1.6 | SSW2.6 61.98,35.36 61.98,31.19 65.33,27.84 65.33,25.5 64.41,24.59 62.99,24.59 61.98,25.6 SSW1ALT.6
SDI_SCLK  (via drill 0.41)
  Top 0.203: 62.99,20.02 62.99,22.55 65.02,24.59 65.02,26.11 63.5,27.64 62.99,27.64 SSW1ALT.7 63.6,27.64 65.02,29.06 65.02,35.87 63.5,37.39 62.99,37.39 SSW2.7 | 62.99,20.02 62.99,17.98 SSW1.7 | v53.85,28.45 53.85,25.91 59.74,20.02 62.99,20.02
  Bottom 0.203: v53.85,28.45 49.89,32.41 49.89,33.53 49.17,34.24 48.36,34.24 47.85,33.73 47.85,33.22 47.55,32.92 47.55,30.48 SERIAL1.7
SSGPA0  (via drill 0.41)
  Top 0.203: v94.79,7.11 93.47,7.11 93.17,6.81 73.25,6.81 70.71,4.27 v68.78,4.27
  Bottom 0.203: v94.79,7.11 97.94,7.11 99.97,9.14 99.97,9.96 IC4.21 | v68.78,4.27 66.65,2.13 59.84,2.13 58.62,3.35 SSW1.2 58.62,3.45 58.62,13.11 SSW1ALT.2
SSGPA1  (via drill 0.41)
  Top 0.203: v84.43,5.59 v97.03,5.59
  Bottom 0.203: v97.03,5.59 100.58,9.14 100.58,9.96 IC4.22 | v84.43,5.59 73.56,16.46 69.49,16.46 63.5,22.45 59.03,22.45 58.62,22.86 SSW2.2
SSGPB0  (via drill 0.41)
  Top 0.203: v82.09,4.06 v104.65,4.06 | v65.23,14.53 63.91,15.85 SSW1.8 | v62.28,20.73 62.28,22.45 63.8,23.98 63.8,25.6 SSW1ALT.8
  Bottom 0.203: v104.65,4.06 104.65,2.74 IC4.1 | v82.09,4.06 80.06,4.06 69.6,14.53 v65.23,14.53 | v62.28,20.73 62.28,20.12 64.01,18.39 64.01,16.05 63.91,15.95 SSW1.8
SSGPB1  (via drill 0.41)
  Top 0.203: v103.94,8.64 103.94,14.53 106.68,17.27 106.68,25.91 103.63,28.96 v80.16,28.96
  Bottom 0.203: v103.94,8.64 103.94,2.74 IC4.2 | v80.16,28.96 70.31,28.96 63.91,35.36 SSW2.8
SW
  Bottom 0.203: JOYSTICK.B1A 87.07,32.11 87.78,31.39 88.9,31.39 C8.1 88.9,31.29 92.15,28.04 92.15,26.62 99.36,19.41 101.19,19.41 102.82,17.78 JOY1.1

## Text on the board
_bsilk: GITHUB: SKAARHOJ-Open-Engineering | SKAARHOJ 2013 | C15 Remote Control PCB | v07-01-13 | BI8-2x4RGB | v07-13